# EAGLE board MUDE - analogMux (EAGLE 7.3.0)
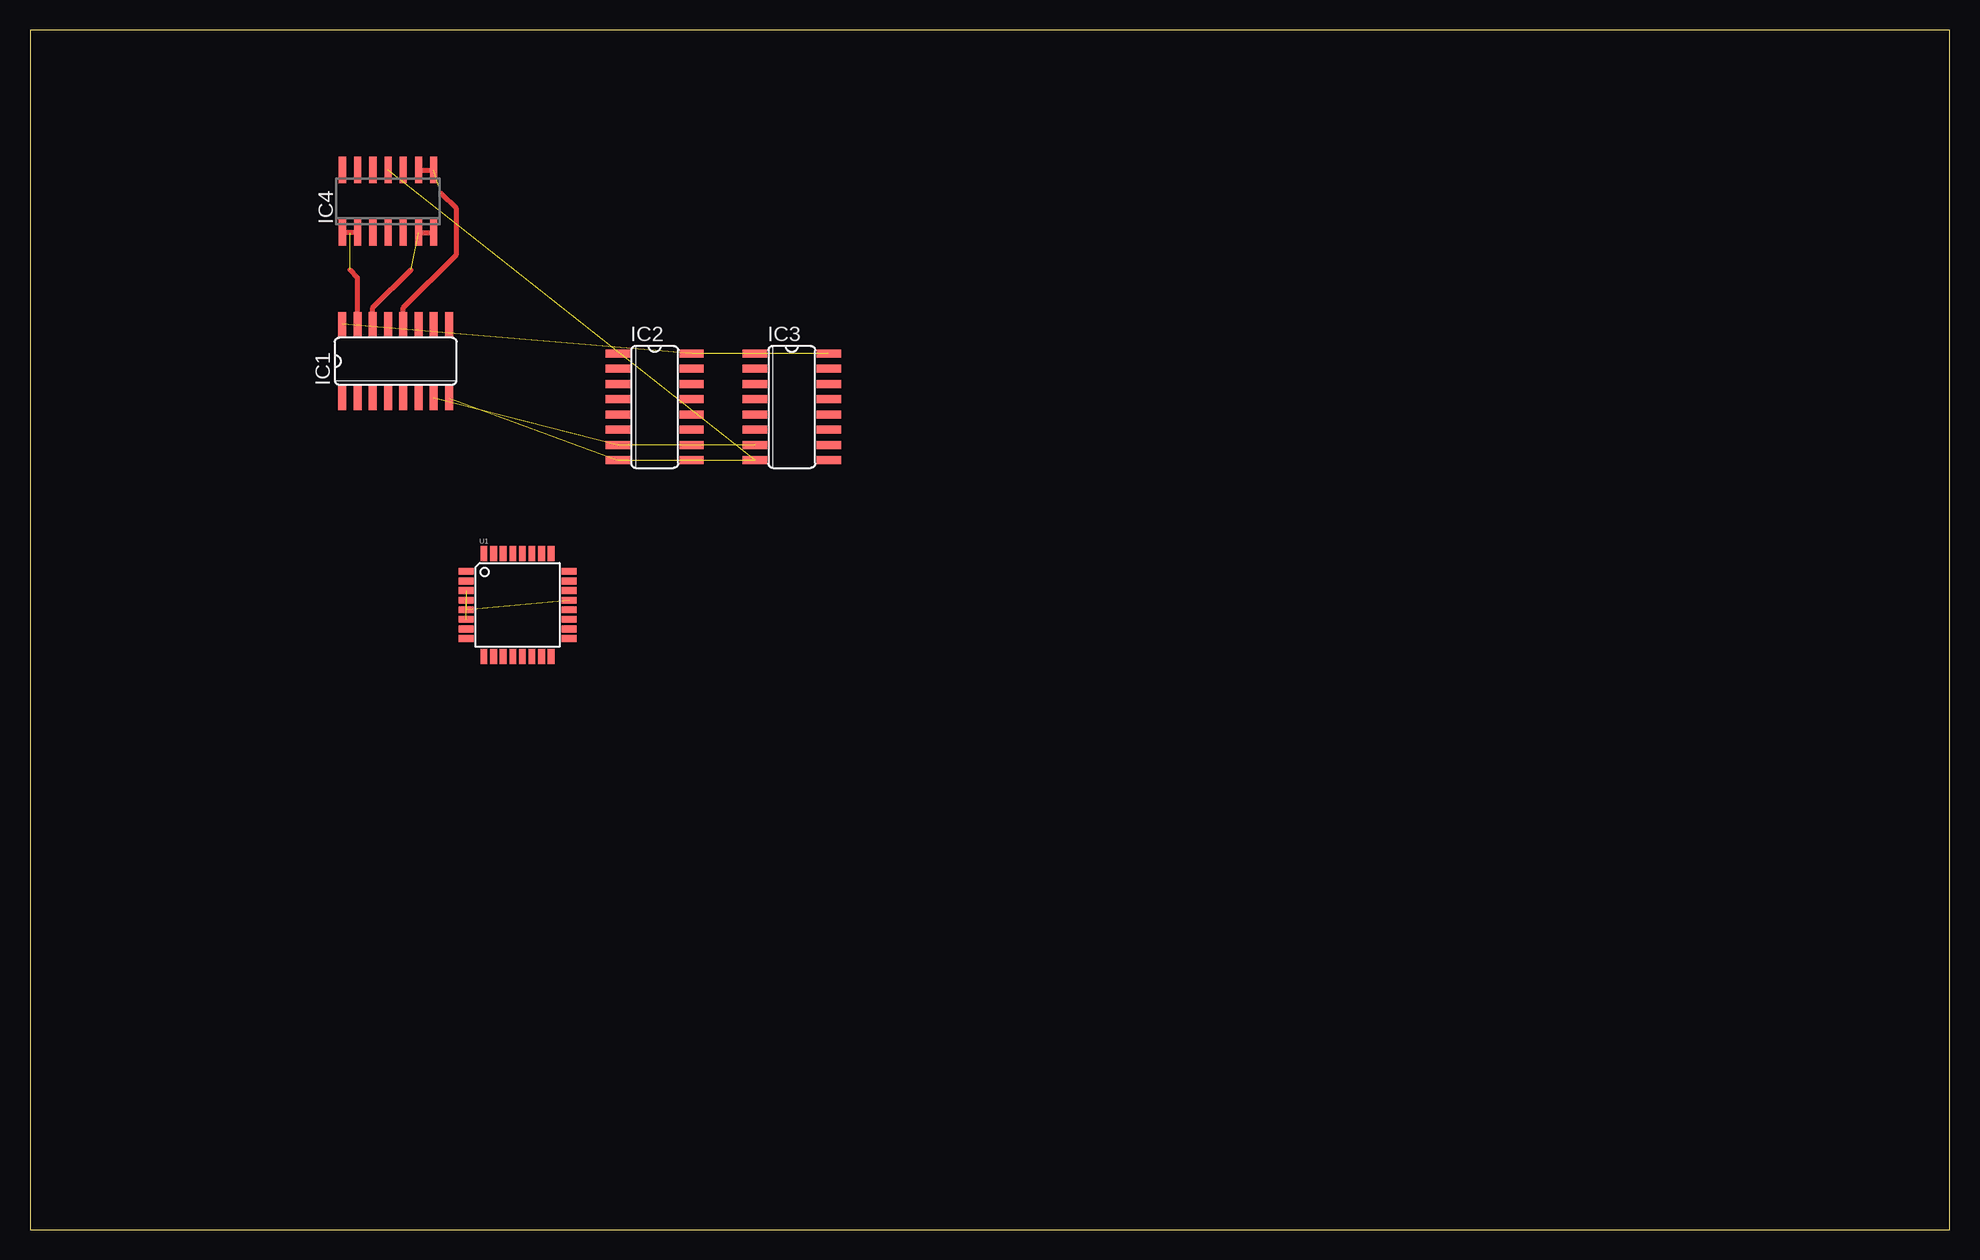
[diagram p0: board, top side]

Size 160 x 100 mm. Coordinates in mm from the lower left corner, seen from the top.
Outline: 0,0 160,0 160,100 0,100 0,0
Copper layers (1*16): Top 0.035mm / dielectric 1.5mm / Bottom 0.035mm
Design rules "default": minimum track width 10mil, minimum drill 0.6mm, track to track 8mil, track to pad 8mil, pad to pad 8mil, via to via 8mil, smd to smd 8mil, copper to edge 40mil, drill to drill 8mil, minimum pad ring 10mil, minimum via ring 8mil, stop-mask expansion 4mil, vias tented up to drill 0mil, thermal gap 10mil

## Footprints (pad centres in the part's own frame; a part is rotated, then mirrored left to right if it is on the bottom)
SO16 = smd 0.66 x 2.032: 1 -4.445,-3.073; 2 -3.175,-3.073; 3 -1.905,-3.073; 4 -0.635,-3.073; 5 0.635,-3.073; 6 1.905,-3.073; 7 3.175,-3.073; 8 4.445,-3.073; 9 4.445,3.073; 10 3.175,3.073; 11 1.905,3.073; 12 0.635,3.073; 13 -0.635,3.073; 14 -1.905,3.073; 15 -3.175,3.073; 16 -4.445,3.073
SO14 = smd 0.6 x 2.2: 1 -3.81,-2.6; 2 -2.54,-2.6; 3 -1.27,-2.6; 4 0,-2.6; 5 1.27,-2.6; 6 2.54,-2.6; 7 3.81,-2.6; 8 3.81,2.6; 9 2.54,2.6; 10 1.27,2.6; 11 0,2.6; 12 -1.27,2.6; 13 -2.54,2.6; 14 -3.81,2.6
TQFP32-08 = smd 1.27 x 0.559: 1 -4.293,2.8; 2 -4.293,2; 3 -4.293,1.2; 4 -4.293,0.4; 5 -4.293,-0.4; 6 -4.293,-1.2; 7 -4.293,-2; 8 -4.293,-2.8; 17 4.293,-2.8; 18 4.293,-2; 19 4.293,-1.2; 20 4.293,-0.4; 21 4.293,0.4; 22 4.293,1.2; 23 4.293,2; 24 4.293,2.8 | smd 0.559 x 1.27: 9 -2.8,-4.293; 10 -2,-4.293; 11 -1.2,-4.293; 12 -0.4,-4.293; 13 0.4,-4.293; 14 1.2,-4.293; 15 2,-4.293; 16 2.8,-4.293; 25 2.8,4.293; 26 2,4.293; 27 1.2,4.293; 28 0.4,4.293; 29 -0.4,4.293; 30 -1.2,4.293; 31 -2,4.293; 32 -2.8,4.293

## Placement (x,y rotation side)
IC1  4052D  [SO16]  30.48,72.39 0 top
IC2  4052D  [SO16]  52.07,68.58 270 top
IC3  4052D  [SO16]  63.5,68.58 270 top
IC4  LM324D  [SO14]  29.84,85.72 0 top
U1  ATMEGA168  [TQFP32-08]  40.64,52.07 0 top

## Library data of the parts
IC1-IC3 = 40xx
IC4 = linear
U1 = SparkFun-DigitalIC

## Nets
+5V: IC4.4
GND: IC1.8 IC2.8 IC3.8 IC4.11
N$1: U1.23
N$2: U1.24
N$3: U1.3 U1.5 U1.21
N$4: U1.4 U1.6
N$5: U1.30
N$6: U1.31
N$7: IC1.13
N$8: IC1.3
N$9: IC1.1
N$10: IC1.5
N$11: IC1.2
N$12: IC1.12 IC4.8 IC4.9
N$13: IC1.14 IC4.6 IC4.7
N$14: IC1.15 IC4.1 IC4.2
N$15: IC4.14
N$16: IC4.3
N$19: IC4.13
N$20: IC4.10
N$21: IC4.5
N$22: IC4.12
VCC: IC1.16 IC2.16 IC3.16
VEE: IC1.7 IC2.7 IC3.7

## Tracks (layer width: path | path; a pad name or v marks a point on that pad's centre or on a via)
GND  (3 unrouted)
N$3  (2 unrouted)
N$4  (1 unrouted)
N$12  (1 unrouted)
  Top 0.406: IC4.9 IC4.8 | IC1.12 31.11,76.83 35.56,81.28 35.56,85.09 34.29,86.36
N$13  (1 unrouted)
  Top 0.406: IC4.6 IC4.7 | IC1.14 28.57,76.83 31.75,80.01
N$14  (1 unrouted)
  Top 0.406: IC4.2 IC4.1 | IC1.15 27.3,79.38 26.67,80.01
VCC  (2 unrouted)
VEE  (2 unrouted)